# Altium PCB Shiftregisters.PcbDoc
Units mm, origin at the board's own origin, x right, y up, seen from the top; angles counter-clockwise.
Board outline 116.84 x 39.37 mm, 2 copper layers (Top Layer, Bottom Layer); 84 components, 106 nets, 276 pads, 47 vias.
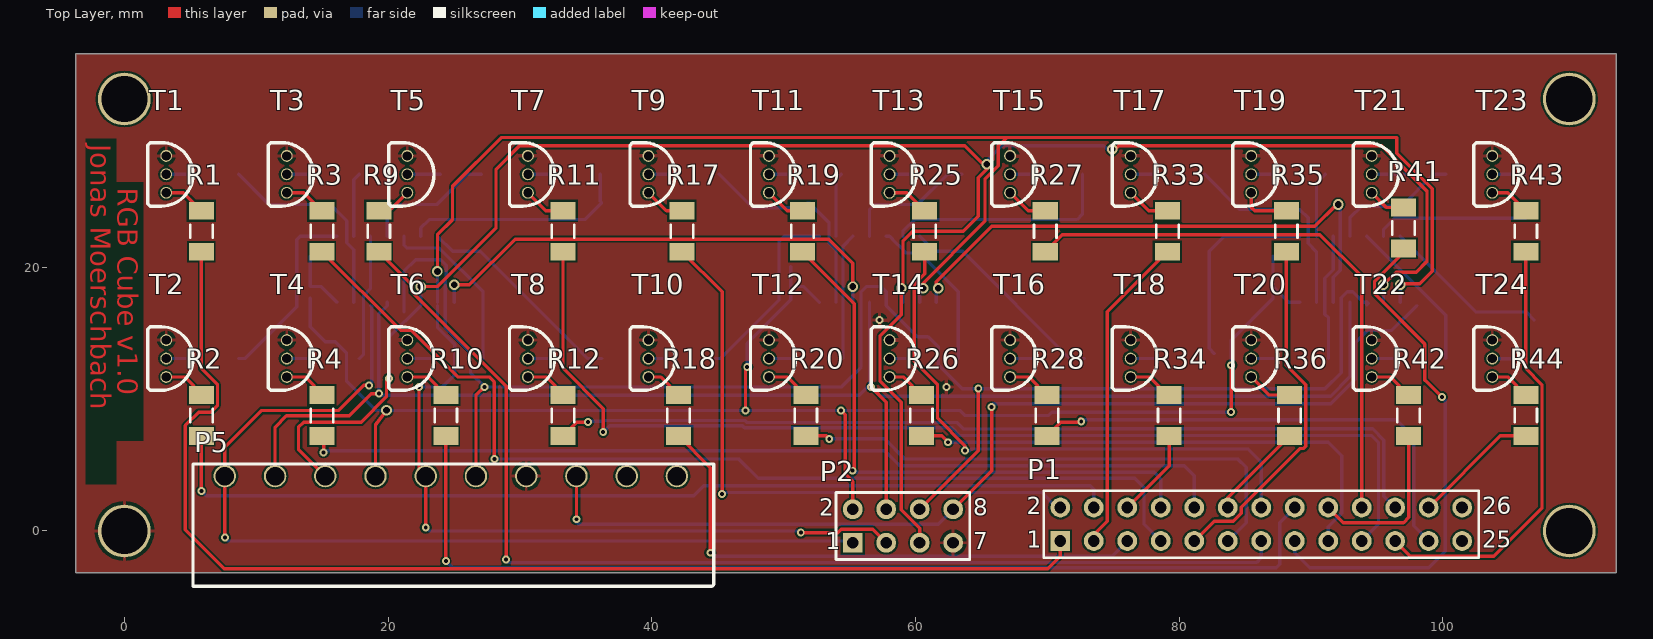
[diagram p0: Top Layer view]
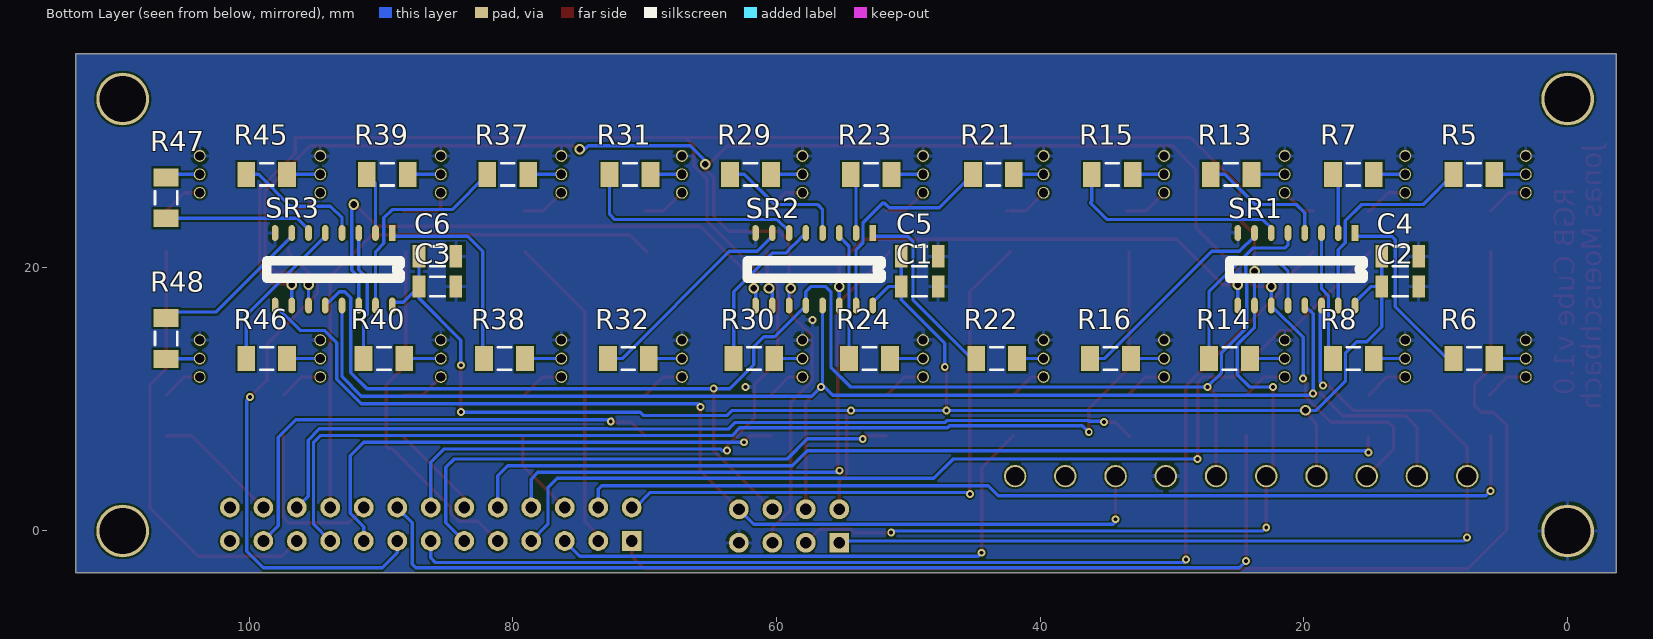
[diagram p1: Bottom Layer view, seen from below]

## Layer stack, top to bottom
Top Solder: solder mask 0.0102, Solder Resist, Dk 3.5
Top Layer: signal copper 0.0356
Dielectric 1: dielectric 0.32, FR-4, Dk 4.8
Bottom Layer: signal copper 0.0356
Bottom Solder: solder mask 0.0102, Solder Resist, Dk 3.5

## Board outline
-3.683,36.195 -3.683,-3.175 113.157,-3.175 113.157,36.195

## Design rules (kind name [scope] priority, off if disabled: settings)
Clearance [All] p1: gap=0.15
DiffPairsRouting [All] p1: maxlimit=0.254 minlimit=0.15 mostfreqgap=0.2 toplayer_minwidth=0.15 toplayer_maxwidth=0.15 toplayer_prefwidth=0.15 bottomlayer_minwidth=0.15 bottomlayer_maxwidth=0.15 bottomlayer_prefwidth=0.15 maxuncoupledlength=12.7
FanoutControl Fanout_SOIC [IsSOIC] p3: bgadir=Out bgaviamode=Centered fanoutstyle=Rows fanoutdirection=InOnly viagrid=0.025 // Fanout_SOIC (Default Rule)
FanoutControl Fanout_Default [All] p5: bgadir=Out bgaviamode=Closest fanoutstyle=Rows fanoutdirection=None viagrid=0.025 // Fanout_Default (Default Rule)
HoleSize [All] p1: absolutevalues=TRUE maxlimit=5.5 minlimit=0.3 maxpercent=80.000 minpercent=20.000
MinimumSolderMaskSliver [All] p1: minsoldermaskwidth=0
PolygonConnect [All] p1: connectstyle=Relief reliefconductorwidth=0.254 reliefentries=4 polygonreliefangle="90 Angle" airgapwidth=0.254
RoutingTopology [OnLayer('Top Layer')] p1: topology=Horizontal
RoutingTopology RoutingTopology_1 [OnLayer('Bottom Layer')] p2: topology=Vertical
RoutingVias [All] p1: holewidth=0.3 width=0.6 viastyle="Through Hole" minholewidth=0.3 minwidth=0.6 maxholewidth=0.3 maxwidth=0.6
SilkToBoardRegionClearance UnpouredPolygon [All] p2:
SilkToSolderMaskClearance [IsPad] p1: minsilkscreentomaskgap=0.01 clearancetoexposedcopper=TRUE
SolderMaskExpansion [All] p1: expansion=0.076
Width [All] p1: maxlimit=2.54 minlimit=0.15 preferedwidth=0.15
22 further rules are at their usual default settings.

## Components (designator, comment, footprint, x,y, rotation, side; value= is the part's Value field where it differs from the comment)
C1 "CAP 100nF 16V 1206(3216)" CAPC1206(3216)190_L 49.149,18.542 r0 bottom
C2 "CAP 100nF 16V 1206(3216)" CAPC1206(3216)190_L 12.7,18.542 r180 bottom
C3 "CAP 100nF 16V 1206(3216)" CAPC1206(3216)190_L 85.725,18.542 r0 bottom
C4 "CAP 1uF 16V 1206(3216)" CAPC1206(3216)150_L 12.7,20.828 r0 bottom
C5 "CAP 1uF 16V 1206(3216)" CAPC1206(3216)150_L 49.149,20.828 r0 bottom
C6 "CAP 1uF 16V 1206(3216)" CAPC1206(3216)150_L 85.725,20.828 r0 bottom
P1 "Header 13X2" HDR2X13 70.993,-0.762 r0 top
P2 "Header 4X2" HDR2X4 55.245,-0.889 r0 top
P5 "Header 10" "10POL PHOENIX" 7.62,0.762 r0 top
R1 "2R 5% 1206(3216)" RESC1206(3216)_M 5.842,22.733 r90 top
R2 "2R 5% 1206(3216)" RESC1206(3216)_M 5.842,8.763 r90 top
R3 "2R 5% 1206(3216)" RESC1206(3216)_M 14.986,22.733 r90 top
R4 "2R 5% 1206(3216)" RESC1206(3216)_M 14.986,8.763 r90 top
R5 "2R 5% 1206(3216)" RESC1206(3216)_M 7.112,27.051 r180 bottom
R6 "2R 5% 1206(3216)" RESC1206(3216)_M 7.112,13.081 r180 bottom
R7 "2R 5% 1206(3216)" RESC1206(3216)_M 16.256,27.051 r180 bottom
R8 "2R 5% 1206(3216)" RESC1206(3216)_M 16.256,13.081 r180 bottom
R9 "2R 5% 1206(3216)" RESC1206(3216)_M 19.304,22.733 r90 top
R10 "2R 5% 1206(3216)" RESC1206(3216)_M 24.384,8.763 r90 top
R11 "2R 5% 1206(3216)" RESC1206(3216)_M 33.274,22.733 r90 top
R12 "2R 5% 1206(3216)" RESC1206(3216)_M 33.274,8.763 r90 top
R13 "2R 5% 1206(3216)" RESC1206(3216)_M 25.527,27.051 r180 bottom
R14 "2R 5% 1206(3216)" RESC1206(3216)_M 25.654,13.081 r180 bottom
R15 "2R 5% 1206(3216)" RESC1206(3216)_M 34.544,27.051 r180 bottom
R16 "2R 5% 1206(3216)" RESC1206(3216)_M 34.671,13.081 r180 bottom
R17 "2R 5% 1206(3216)" RESC1206(3216)_M 42.291,22.733 r90 top
R18 "2R 5% 1206(3216)" RESC1206(3216)_M 42.037,8.763 r90 top
R19 "2R 5% 1206(3216)" RESC1206(3216)_M 51.435,22.733 r90 top
R20 "2R 5% 1206(3216)" RESC1206(3216)_M 51.689,8.763 r90 top
R21 "2R 5% 1206(3216)" RESC1206(3216)_M 43.561,27.051 r180 bottom
R22 "2R 5% 1206(3216)" RESC1206(3216)_M 43.307,13.081 r180 bottom
R23 "2R 5% 1206(3216)" RESC1206(3216)_M 52.832,27.051 r180 bottom
R24 "2R 5% 1206(3216)" RESC1206(3216)_M 52.959,13.081 r180 bottom
R25 "2R 5% 1206(3216)" RESC1206(3216)_M 60.706,22.733 r90 top
R26 "2R 5% 1206(3216)" RESC1206(3216)_M 60.452,8.763 r90 top
R27 "2R 5% 1206(3216)" RESC1206(3216)_M 69.85,22.733 r90 top
R28 "2R 5% 1206(3216)" RESC1206(3216)_M 69.977,8.763 r90 top
R29 "2R 5% 1206(3216)" RESC1206(3216)_M 61.976,27.051 r180 bottom
R30 "2R 5% 1206(3216)" RESC1206(3216)_M 61.722,13.081 r180 bottom
R31 "2R 5% 1206(3216)" RESC1206(3216)_M 71.12,27.051 r180 bottom
R32 "2R 5% 1206(3216)" RESC1206(3216)_M 71.247,13.081 r180 bottom
R33 "2R 5% 1206(3216)" RESC1206(3216)_M 79.121,22.733 r90 top
R34 "2R 5% 1206(3216)" RESC1206(3216)_M 79.248,8.763 r90 top
R35 "2R 5% 1206(3216)" RESC1206(3216)_M 88.138,22.733 r90 top
R36 "2R 5% 1206(3216)" RESC1206(3216)_M 88.392,8.763 r90 top
R37 "2R 5% 1206(3216)" RESC1206(3216)_M 80.391,27.051 r180 bottom
R38 "2R 5% 1206(3216)" RESC1206(3216)_M 80.645,13.081 r180 bottom
R39 "2R 5% 1206(3216)" RESC1206(3216)_M 89.535,27.051 r180 bottom
R40 "2R 5% 1206(3216)" RESC1206(3216)_M 89.789,13.081 r180 bottom
R41 "2R 5% 1206(3216)" RESC1206(3216)_M 97.028,22.987 r90 top
R42 "2R 5% 1206(3216)" RESC1206(3216)_M 97.409,8.763 r90 top
R43 "2R 5% 1206(3216)" RESC1206(3216)_M 106.299,22.733 r90 top
R44 "2R 5% 1206(3216)" RESC1206(3216)_M 106.299,8.763 r90 top
R45 "2R 5% 1206(3216)" RESC1206(3216)_M 98.679,27.051 r180 bottom
R46 "2R 5% 1206(3216)" RESC1206(3216)_M 98.679,13.081 r180 bottom
R47 "2R 5% 1206(3216)" RESC1206(3216)_M 106.299,25.273 r90 bottom
R48 "2R 5% 1206(3216)" RESC1206(3216)_M 106.299,14.605 r270 bottom
SR1 "Blue" SOP16 16.129,22.352 r270 bottom
SR2 "Green" SOP16 52.705,22.352 r270 bottom
SR3 "Red" SOP16 89.154,22.352 r270 bottom
T1 "NPN-Transistor" "2N3904 - DUPLICATE" 3.175,27.051 r90 top
T2 "NPN-Transistor" "2N3904 - DUPLICATE" 3.175,13.081 r90 top
T3 "NPN-Transistor" "2N3904 - DUPLICATE" 12.319,27.051 r90 top
T4 "NPN-Transistor" "2N3904 - DUPLICATE" 12.319,13.081 r90 top
T5 "NPN-Transistor" "2N3904 - DUPLICATE" 21.463,27.051 r90 top
T6 "NPN-Transistor" "2N3904 - DUPLICATE" 21.463,13.081 r90 top
T7 "NPN-Transistor" "2N3904 - DUPLICATE" 30.607,27.051 r90 top
T8 "NPN-Transistor" "2N3904 - DUPLICATE" 30.607,13.081 r90 top
T9 "NPN-Transistor" "2N3904 - DUPLICATE" 39.751,27.051 r90 top
T10 "NPN-Transistor" "2N3904 - DUPLICATE" 39.751,13.081 r90 top
T11 "NPN-Transistor" "2N3904 - DUPLICATE" 48.895,27.051 r90 top
T12 "NPN-Transistor" "2N3904 - DUPLICATE" 48.895,13.081 r90 top
T13 "NPN-Transistor" "2N3904 - DUPLICATE" 58.039,27.051 r90 top
T14 "NPN-Transistor" "2N3904 - DUPLICATE" 58.039,13.081 r90 top
T15 "NPN-Transistor" "2N3904 - DUPLICATE" 67.183,27.051 r90 top
T16 "NPN-Transistor" "2N3904 - DUPLICATE" 67.183,13.081 r90 top
T17 "NPN-Transistor" "2N3904 - DUPLICATE" 76.327,27.051 r90 top
T18 "NPN-Transistor" "2N3904 - DUPLICATE" 76.327,13.081 r90 top
T19 "NPN-Transistor" "2N3904 - DUPLICATE" 85.471,27.051 r90 top
T20 "NPN-Transistor" "2N3904 - DUPLICATE" 85.471,13.081 r90 top
T21 "NPN-Transistor" "2N3904 - DUPLICATE" 94.615,27.051 r90 top
T22 "NPN-Transistor" "2N3904 - DUPLICATE" 94.615,13.081 r90 top
T23 "NPN-Transistor" "2N3904 - DUPLICATE" 103.759,27.051 r90 top
T24 "NPN-Transistor" "2N3904 - DUPLICATE" 103.759,13.081 r90 top

## Footprints (in the part's own frame and the unit in brackets; to place one, negate y for a bottom-side part, rotate by r counter-clockwise, add the part's x,y. Pads: shape width x height; smd on the part's side, far side on the other; paste and mask are expansions set on the pad)
"2N3904 - DUPLICATE" [mm] "Farnell: 1700648"
  round 0.9 hole 0.7: 1(-1.4,0) 2(0,0) 3(1.4,0)
  silkscreen extent -2.41,-2.03 2.41,1.4, body extent -2.77,-2.79 2.77,1.28, height 7.7
"10POL PHOENIX" [mm]
  round 1.7 hole 1.4: 1(0,3.4) 2(3.81,3.4) 3(7.62,3.4) 4(11.43,3.4) 5(15.24,3.4) 6(19.05,3.4) 7(22.86,3.4) 8(26.67,3.4) 9(30.48,3.4) 10(34.29,3.4)
  silkscreen extent -2.41,-4.95 37.08,4.32, body extent -2.47,-4.83 37.02,4.47, height 3.9
CAPC1206(3216)150_L [mm] "Chip Capacitor, Body 3.2x1.6mm, Height 1.5mm, IPC High Density"
  rect 0.95x1.7 smd: 1(-1.4,0) 2(1.4,0)
  silkscreen extent -0.55,-0.75 0.55,0.75, body extent -1.7,-0.9 1.7,0.9, height 1.5
CAPC1206(3216)190_L [mm] "Chip Capacitor, Body 3.2x1.6mm, Height 1.9mm, IPC High Density"
  rect 0.95x1.7 smd: 1(-1.4,0) 2(1.4,0)
  silkscreen extent -0.55,-0.75 0.55,0.75, body extent -1.7,-0.9 1.7,0.9, height 1.9
HDR2X4 [mm] "Connector; Header; 4x2 Position"
  rect 1.5x1.5 hole 0.9: 1(0,0)
  round 1.5 hole 0.9: 2(0,2.54) 3(2.54,0) 4(2.54,2.54) 5(5.08,0) 6(5.08,2.54) 7(7.62,0) 8(7.62,2.54)
  silkscreen extent -1.27,-1.27 8.89,3.81
HDR2X13 [mm] "Connector; Header; 13x2 Position"
  rect 1.5x1.5 hole 0.9: 1(0,0)
  round 1.5 hole 0.9: 2(0,2.54) 3(2.54,0) 4(2.54,2.54) 5(5.08,0) 6(5.08,2.54) 7(7.62,0) 8(7.62,2.54) 9(10.16,0) 10(10.16,2.54) 11(12.7,0) 12(12.7,2.54) 13(15.24,0) 14(15.24,2.54) 15(17.78,0) 16(17.78,2.54) 17(20.32,0) 18(20.32,2.54) 19(22.86,0) 20(22.86,2.54) 21(25.4,0) 22(25.4,2.54) 23(27.94,0) 24(27.94,2.54) 25(30.48,0) 26(30.48,2.54)
  silkscreen extent -1.27,-1.27 31.75,3.81
RESC1206(3216)_M [mm] "Chip Resistor, Body 3.2x1.6mm, IPC Low Density"
  rect 1.35x1.9 smd: 1(-1.55,0) 2(1.55,0)
  silkscreen extent -0.5,-0.85 0.5,0.85, body extent -1.67,-0.87 1.67,0.87, height 0.75
SOP16 [mm]
  rect 1.2x0.5 smd: 1(-0.25,0)
  oval 1.2x0.5 smd: 2(-0.25,-1.27) 3(-0.25,-2.54) 4(-0.25,-3.81) 5(-0.25,-5.08) 6(-0.25,-6.35) 7(-0.25,-7.62) 8(-0.25,-8.89) 9(5.25,-8.89) 10(5.25,-7.62) 11(5.25,-6.35) 12(5.25,-5.08) 13(5.25,-3.81) 14(5.25,-2.54) 15(5.25,-1.27) 16(5.25,0)
  silkscreen extent 1.86,-9.53 3.17,0.63

## Part data
C1 C2 C3: library part CMP-1037-04176-1, "CAP 100nF 16V ±1% 1206 (3216 Metric) Thickness 1.9mm SMD"
C4 C5 C6: library part CMP-1037-04681-1, "CAP 1uF 16V ±5% 1206 (3216 Metric) Thickness 1.45mm SMD"
P1: "Header, 13-Pin, Dual row"
P2: "Header, 4-Pin, Dual row"
P5: "Header, 10-Pin"
R1 R2 R3 R4 R5 R6 R7 R8 R9 R10 R11 R12 R13 R14 R15 R16 R17 R18 R19 R20 R21 R22 R23 R24 R25 R26 R27 R28 R29 R30 R31 R32 R33 R34 R35 R36 R37 R38 R39 R40 R41 R42 R43 R44 R45 R46 R47 R48: library part CMP-1014-00009-1, "2R 0.25W 5% 1206 (3216 Metric)  SMD"
SR1 SR2 SR3: library part 74HC595, "74HC595 Farnell:  2098004"

## Free pads (board coordinates)
  round 4 hole 3.5: 0(0,0) 1(0,32.766) 2(109.601,32.766) 3(109.601,0)

## Via types
v1: diameter 0.6, hole 0.3, Top Layer to Bottom Layer, 34 vias
v2: diameter 0.8, hole 0.5, Top Layer to Bottom Layer, 13 vias

## Nets (pads, with @x,y where several pads share a name; then routed paths per layer and width w, separated by ;. In a path a pad name is that pad's centre, name@x,y a point inside that pad or via, vN(x,y) a via of type N, cw(c..) or ccw(c..) an arc to the next point about the centre after c; other vN are vias at no path point)
5V: C1.2 C2.1 C3.2 C4.2 C5.2 C6.2 P2.2 P5.4 SR1.16 SR2.16 SR3.16 | length 124.7
  Top Layer w0.254: P5.4 19.05,8.055 v2(19.885,9.144) ; v1(47.117,9.144) 47.117,12.319 v1(47.244,12.446) ; v1(54.356,9.144) 54.668,8.832 54.668,4.333 55.245,3.756 P2.2 ; v1(83.947,9.017) v1(83.947,12.573)
  Bottom Layer w0.254: 14.1,17.653 14.1,15.494 15.243,14.351 16.002,14.351 16.854,13.499 16.854,11.34 19.05,9.144 v2(19.885,9.144) v1(47.117,9.144) v1(54.356,9.144) 63.373,9.144 63.754,8.763 70.104,8.763 70.358,9.017 v1(83.947,9.017) ; C4.2 C2.1 14.939,18.542 SR1.16@16.129,17.352 ; v1(47.244,12.446) 47.244,14.224 50.549,17.529 C1.2 ; C5.2@50.549,20.066 C1.2 ; SR2.16@52.705,17.352 51.515,18.542 C1.2 ; v1(83.947,12.573) 83.947,14.478 87.125,17.656 C3.2 ; C6.2 C3.2 ; SR3.16@89.154,17.352 88.315,17.352 C3.2
B_0: P1.1 R1.1 | length 92.3
  Top Layer w0.254: R1.1 5.842,12.33 7.069,11.103 7.069,9.523 6.563,9.017 5.629,9.017 4.615,8.003 4.615,0.084 7.562,-2.863 70.035,-2.863 70.993,-1.905 P1.1
B_1: P1.4 R2.1 | length 73.8
  Top Layer w0.254: v1(5.842,3.048) R2.1
  Bottom Layer w0.254: v1(5.842,3.048) 6.223,2.667 43.18,2.667 43.942,3.429 73.279,3.429 73.533,3.175 P1.4
B_2: P1.7 R3.1 | length 77.8
  Top Layer w0.254: R3.1 20.961,15.208 21.764,15.208 25.288,11.684 27.686,11.684 28.067,11.303 v1(28.067,5.461)
  Bottom Layer w0.254: v1(28.067,5.461) 46.609,5.461 48.075,3.995 76.627,3.995 77.343,3.279 77.343,0.508 P1.7
B_3: P1.10 R4.1 | length 70.4
  Top Layer w0.254: v1(15.113,5.969) R4.1@15.113,7.086
  Bottom Layer w0.254: v1@15.113,6.096 57.658,6.096 58.801,4.953 80.391,4.953 81.153,4.191 P1.10
B_4: P1.13 R9.1 | length 86.2
  Top Layer w0.254: R9.1 21.802,18.685 21.802,18.139 28.956,10.985 v1(28.956,-2.159)
  Bottom Layer w0.254: v1(28.956,-2.159) 28.956,-2.286 29.06,-2.39 85.875,-2.39 86.233,-2.032 P1.13
B_5: P1.16 R10.1 | length 77.9
  Top Layer w0.254: v1(24.384,-2.286) R10.1
  Bottom Layer w0.254: v1(24.384,-2.286) 24.892,-2.794 87.376,-2.794 87.63,-2.54 87.63,0.635 P1.16
B_6: P1.19 R11.1 | length 82.5
  Top Layer w0.254: R11.1 33.274,12.33 36.322,9.282 v1(36.322,7.493)
  Bottom Layer w0.254: v1(36.322,7.493) 36.807,7.978 46.886,7.978 47.036,7.828 62.784,7.828 63.373,7.239 94.615,7.239 95.123,6.731 95.123,0.508 P1.19
B_7: P1.22 R12.1 | length 68.9
  Top Layer w0.254: R12.1@33.213,7.152 R12.1 34.316,8.255 v1(35.179,8.255)
  Bottom Layer w0.254: v1(35.179,8.255) 35.237,8.313 36.317,8.313 36.386,8.382 47.054,8.382 47.204,8.232 63.142,8.232 63.632,7.742 72.819,7.742 72.825,7.747 94.678,7.747 95.527,6.898 95.527,2.644 P1.22
B_Q0: R5.1 SR1.15 | length 16.1
  Bottom Layer w0.254: R5.1 10.948,24.765 15.621,24.765 16.872,23.514 16.872,21.859 17.399,21.332 SR1.15@17.399,17.352
B_Q1: R6.1 SR1.1 | length 14.3
  Bottom Layer w0.254: R6.1 9.144,13.081 13.081,17.018 13.081,22.098 13.335,22.352 SR1.1@16.129,22.352
B_Q2: R7.1 SR1.2 | length 4.9
  Bottom Layer w0.254: SR1.2@17.399,22.352 17.399,26.644 R7.1
B_Q3: R8.1 SR1.3 | length 9.6
  Bottom Layer w0.254: R8.1 18.142,13.417 18.142,17.845 18.669,18.372 SR1.3@18.669,22.352
B_Q4: R13.1 SR1.4 | length 10.1
  Bottom Layer w0.254: SR1.4@19.939,22.352 19.939,24.13 20.574,24.765 23.708,24.765 25.994,27.051 R13.1
B_Q5: R14.1 SR1.5 | length 13.2
  Bottom Layer w0.254: SR1.5@21.209,22.352 21.209,21.717 21.463,21.463 23.876,21.463 27.204,18.135 R14.1
B_Q6: R15.1 SR1.6 | length 17.3
  Bottom Layer w0.254: SR1.6@22.479,22.352 22.479,22.987 23.114,23.622 34.925,23.622 36.195,24.892 36.094,24.993 R15.1
B_Q7: R16.1 SR1.7 | length 16.3
  Bottom Layer w0.254: SR1.7@23.749,22.352 24.892,21.209 27.01,21.209 35.138,13.081 R16.1
DS: P2.1 P5.1 SR1.14 | length 73.5
  Top Layer w0.254: v1(7.62,-0.508) P5.1 7.62,6.35 10.414,9.144 16.256,9.144 18.161,11.049 v1(18.542,11.049)
  Bottom Layer w0.254: v1(7.62,-0.508) 7.874,-0.762 P2.1@55.118,-0.762 ; v1(18.542,11.049) 18.758,11.265 18.758,17.013 SR1.14
G_0: P1.2 R17.1 | length 46.1
  Top Layer w0.254: R17.1 45.339,18.135 v1(45.339,2.794)
  Bottom Layer w0.254: v1@45.212,2.921 v1(45.339,2.794) 45.339,2.921 69.573,2.921 70.716,1.778 P1.2
G_1: P1.5 R18.1 | length 42.1
  Top Layer w0.254: R18.1 44.45,4.8 v1(44.45,-1.651)
  Bottom Layer w0.254: v1(44.45,-1.651) 44.704,-1.905 54.369,-1.905 54.38,-1.916 74.919,-1.916 P1.5
G_2: P1.8 R19.1 | length 43.9
  Top Layer w0.254: R19.1 55.372,17.246 55.372,4.699 v1(55.245,4.572)
  Bottom Layer w0.254: v1@55.372,4.445 78.105,4.445 78.613,3.937 P1.8
G_3: P1.11 R20.1 | length 40.2
  Top Layer w0.254: R20.1 53.239,7.213
  Bottom Layer w0.254: v1(53.467,6.985) 57.658,6.985 59.182,5.461 84.455,5.461 85.09,4.826 85.09,0.635 P1.11
G_4: P1.14 R25.1 | length 43.7
  Top Layer w0.254: R25.1 60.706,19.499 59.902,18.695 59.902,12.88 61.679,11.103 61.679,8.552 63.754,6.477 63.754,5.969 v1(63.754,6.096)
  Bottom Layer w0.254: v1(63.754,6.096) 64.135,6.096 64.262,6.223 85.217,6.223 86.233,5.207 P1.14
G_5: P1.17 R26.1 | length 39.4
  Top Layer w0.254: R26.1 62.002,7.213 v1(62.484,6.731)
  Bottom Layer w0.254: v1(62.484,6.731) 91.313,6.731 92.34,5.704 92.34,1.353 91.313,0.326 P1.17
G_6: P1.20 R27.1 | length 43.4
  Top Layer w0.254: R27.1 71.146,22.479 90.678,22.479 93.853,19.304 P1.20
G_7: P1.23 R28.1 | length 38.3
  Top Layer w0.254: R28.1 71.019,8.255 72.644,8.255 72.517,8.382 72.517,8.509 72.581,8.445 v1(72.581,8.319)
  Bottom Layer w0.254: v1(72.581,8.319) 72.581,8.445 72.517,8.509 72.517,8.382 72.644,8.255 72.829,8.44 96.462,8.44 97.79,7.112 97.79,0.381 P1.23
G_Q0: R21.1 SR2.15 | length 16.4
  Bottom Layer w0.254: R21.1 47.651,24.511 51.463,24.511 51.83,24.878 51.955,24.878 53.448,23.385 53.448,21.859 53.975,21.332 SR2.15@53.975,17.352
G_Q1: R22.1 SR2.1 | length 14.3
  Bottom Layer w0.254: R22.1 45.212,13.081 49.657,17.526 49.657,21.971 50.038,22.352 SR2.1@52.705,22.352
G_Q2: R23.1 SR2.2 | length 4.9
  Bottom Layer w0.254: SR2.2@53.975,22.352 53.975,26.644 R23.1
G_Q3: R24.1 SR2.3 | length 9.6
  Bottom Layer w0.254: R24.1 54.509,21.616 SR2.3@55.245,22.352
G_Q4: R29.1 SR2.4 | length 10.1
  Bottom Layer w0.254: SR2.4@56.515,22.352 56.515,24.384 56.896,24.765 60.157,24.765 62.443,27.051 R29.1
G_Q5: R30.1 SR2.5 | length 12.3
  Bottom Layer w0.254: SR2.5@57.785,22.352 58.039,22.352 58.528,21.863 58.528,21.859 58.837,21.55 58.841,21.55 59.309,21.082 60.325,21.082 63.246,18.161 63.246,13.107 R30.1
G_Q6: R31.1 SR2.6 | length 17.6
  Bottom Layer w0.254: SR2.6@59.055,22.352 59.055,22.733 59.944,23.622 72.263,23.622 72.67,24.029 R31.1
G_Q7: R32.1 SR2.7 | length 16.3
  Bottom Layer w0.254: SR2.7@60.325,22.352 61.468,21.209 63.586,21.209 71.714,13.081 R32.1
GND: C1.1 C2.2 C3.1 C4.1 C5.1 C6.1 P2.7 P5.7 pad.0 SR1.8 SR2.8 SR3.8 T1.3 T2.3 T3.3 T4.3 T5.3 T6.3 T7.3 T8.3 T9.3 T10.3 T11.3 T12.3 T13.3 T14.3 T15.3 T16.3 T17.3 T18.3 T19.3 T20.3 T21.3 T22.3 T23.3 T24.3
  other v1: 62.357,10.922 57.289,15.991
MR: P2.3 P5.5 SR1.10 SR2.10 SR3.10 | length 169.3
  Top Layer w0.254: v1(22.352,10.922) 22.352,4.67 P5.5 v1(22.86,0.254) ; v2(23.749,19.685) 23.749,22.483 24.89,23.624 24.89,26.16 28.575,29.845 66.929,29.845 ; v1(51.308,-0.127) 54.115,-0.127 54.38,0.138 56.758,0.138 P2.3 ; v2(60.579,18.415) 60.452,18.415 60.325,18.542 65.278,23.495 65.278,26.67 66.294,27.686 66.294,29.21 66.929,29.845 ; v2(96.774,18.669) 96.869,18.764 98.266,18.764 99.21,19.708 99.21,25.948 96.52,28.638 96.52,29.845 66.929,29.845
  Bottom Layer w0.254: v1(22.352,10.922) 24.13,10.922 25.019,11.811 25.019,11.858 25.056,11.895 25.056,14.146 23.749,15.453 SR1.10 ; v1(22.86,0.254) 23.114,0 51.181,0 v1(51.308,-0.127) ; SR1.10@23.749,17.352 v2(23.749,19.685) v2@23.749,19.939 ; SR2.10@60.325,17.352 60.325,18.542 60.452,18.415 v2(60.579,18.415) ; SR3.10@96.774,17.352 v2(96.774,18.669)
NetR1_2: R1.2 T1.1 | length 3.2
  Top Layer w0.254: T1.1 4.474,25.651 R1.2
NetR2_2: R2.2 T2.1 | length 3.3
  Top Layer w0.254: T2.1 4.575,11.681 R2.2@5.943,10.313
NetR3_2: R3.2 T3.1 | length 3.3
  Top Layer w0.254: T3.1 13.618,25.651 R3.2 ; R3.2@15.087,24.283 R3.2@15.119,24.251
NetR4_2: R4.2 T4.1 | length 3.3
  Top Layer w0.254: T4.1 13.719,11.681 R4.2@15.087,10.313
NetR5_2: R5.2 T1.2 | length 2.4
  Bottom Layer w0.254: T1.2 R5.2
NetR6_2: R6.2 T2.2 | length 2.4
  Bottom Layer w0.254: T2.2 R6.2
NetR7_2: R7.2 T3.2 | length 2.4
  Bottom Layer w0.254: T3.2 R7.2
NetR8_2: R8.2 T4.2 | length 2.4
  Bottom Layer w0.254: T4.2 R8.2
NetR9_2: R9.2 T5.1 | length 2.8
  Top Layer w0.254: R9.2@19.336,24.251 R9.2 20.095,24.283 T5.1
NetR10_2: R10.2 T6.1 | length 3.6
  Top Layer w0.254: T6.1 23.016,11.681 R10.2 R10.2@24.231,10.313
NetR11_2: R11.2 T7.1 | length 3.3
  Top Layer w0.254: T7.1 31.975,24.283 R11.2 ; R11.2@33.375,24.283 R11.2@33.407,24.251
NetR12_2: R12.2 T8.1 | length 3.3
  Top Layer w0.254: T8.1 32.007,11.681 R12.2@33.375,10.313
NetR13_2: R13.2 T5.2 | length 2.5
  Bottom Layer w0.254: T5.2 R13.2
NetR14_2: R14.2 T6.2 | length 2.6
  Bottom Layer w0.254: T6.2 R14.2
NetR15_2: R15.2 T7.2 | length 2.4
  Bottom Layer w0.254: T7.2 R15.2
NetR16_2: R16.2 T8.2 | length 2.5
  Bottom Layer w0.254: T8.2 R16.2
NetR17_2: R17.2 T9.1 | length 3.2
  Top Layer w0.254: T9.1 41.119,24.283 R17.2 ; R17.2@42.519,24.283 R17.2@42.551,24.251
NetR18_2: R18.2 T10.1 | length 2.9
  Top Layer w0.254: T10.1 40.669,11.681 R18.2
NetR19_2: R19.2 T11.1 | length 3.2
  Top Layer w0.254: T11.1 50.263,24.283 R19.2 ; R19.2@51.663,24.283 R19.2@51.695,24.251
NetR20_2: R20.2 T12.1 | length 3.3
  Top Layer w0.254: T12.1 50.295,11.681 R20.2@51.663,10.313
NetR21_2: R21.2 T9.2 | length 2.3
  Bottom Layer w0.254: T9.2 R21.2
NetR22_2: R22.2 T10.2 | length 2
  Bottom Layer w0.254: T10.2 R22.2
NetR23_2: R23.2 T11.2 | length 2.4
  Bottom Layer w0.254: T11.2 R23.2
NetR24_2: R24.2 T12.2 | length 2.5
  Bottom Layer w0.254: T12.2 R24.2
NetR25_2: R25.2 T13.1 | length 3.3
  Top Layer w0.254: T13.1 59.338,25.651 R25.2 ; R25.2@60.807,24.283 R25.2@60.839,24.251
NetR26_2: R26.2 T14.1 | length 3
  Top Layer w0.254: T14.1 59.084,11.681 R26.2
NetR27_2: R27.2 T15.1 | length 3.3
  Top Layer w0.254: T15.1 68.551,24.283 R27.2 ; R27.2@69.951,24.283 R27.2@69.983,24.251
NetR28_2: R28.2 T16.1 | length 3.4
  Top Layer w0.254: T16.1 68.609,11.681 R28.2 R28.2@69.951,10.313
NetR29_2: R29.2 T13.2 | length 2.4
  Bottom Layer w0.254: T13.2 R29.2
NetR30_2: R30.2 T14.2 | length 2.1
  Bottom Layer w0.254: T14.2 R30.2
NetR31_2: R31.2 T15.2 | length 2.4
  Bottom Layer w0.254: T15.2 R31.2
NetR32_2: R32.2 T16.2 | length 2.5
  Bottom Layer w0.254: T16.2 R32.2
NetR33_2: R33.2 T17.1 | length 3.4
  Top Layer w0.254: T17.1 77.695,24.283 R33.2@79.095,24.283 ; R33.2 R33.2@79.095,24.283 ; R33.2@79.127,24.251 R33.2@79.095,24.283
NetR34_2: R34.2 T18.1 | length 3.4
  Top Layer w0.254: T18.1 77.727,11.681 R34.2@79.127,10.281
NetR35_2: R35.2 T19.1 | length 4
  Top Layer w0.254: T19.1 85.471,24.537 85.725,24.283 R35.2 88.239,24.283 R35.2@88.271,24.251
NetR36_2: R36.2 T20.1 | length 3.4
  Top Layer w0.254: T20.1 86.839,10.313 88.239,10.313 R36.2@88.271,10.281
NetR37_2: R37.2 T17.2 | length 2.5
  Bottom Layer w0.254: T17.2 R37.2
NetR38_2: R38.2 T18.2 | length 3
  Bottom Layer w0.254: T18.2 R38.2 79.095,12.853 R38.2@79.121,12.827
NetR39_2: R39.2 T19.2 | length 2.5
  Bottom Layer w0.254: T19.2 R39.2
NetR40_2: R40.2 T20.2 | length 2.8
  Bottom Layer w0.254: T20.2 R40.2
NetR41_2: R41.2 T21.1 | length 2.9
  Top Layer w0.254: T21.1 95.729,24.537 R41.2 ; R41.2@97.383,24.283 R41.2@97.415,24.251
NetR42_2: R42.2 T22.1 | length 3.3
  Top Layer w0.254: T22.1 96.015,11.681 R42.2@97.383,10.313
NetR43_2: R43.2 T23.1 | length 3.1
  Top Layer w0.254: T23.1 104.931,25.651 R43.2
NetR44_2: R44.2 T24.1 | length 3.1
  Top Layer w0.254: T24.1 104.931,11.681 R44.2
NetR45_2: R45.2 T21.2 | length 2.5
  Bottom Layer w0.254: T21.2 R45.2
NetR46_2: R46.2 T22.2 | length 2.5
  Bottom Layer w0.254: T22.2 R46.2
NetR47_2: R47.2 T23.2 | length 2.5
  Bottom Layer w0.254: T23.2 R47.2@106.273,27.051
NetR48_2: R48.2 T24.2 | length 2.6
  Bottom Layer w0.254: T24.2 103.785,13.055 R48.2
NetSR1_9: SR1.9 SR2.14 | length 36.4
  Top Layer w0.254: v2(25.019,18.669) 26.168,18.669 29.634,22.135 53.43,22.135 55.245,20.32 v2(55.245,18.542)
  Bottom Layer w0.254: SR1.9@25.019,17.352 v2@25.019,18.415 ; SR2.14@55.245,17.352 v2(55.245,18.542)
NetSR2_9: SR2.9 SR3.14 | length 42.4
  Top Layer w0.254: v2(61.722,18.415) 61.595,18.542 61.595,18.923 65.786,23.114 90.297,23.114 v2@91.948,24.765
  Bottom Layer w0.254: SR2.9@61.595,17.352 61.595,18.542 v2(61.722,18.415) ; SR3.14@91.694,17.352 91.694,19.241 92.221,19.768 92.221,24.619 v2(92.075,24.765)
OE: P2.4 P5.2 SR1.13 SR2.13 SR3.13 | length 116.5
  Top Layer w0.254: P5.2 11.43,7.874 12.296,8.74 17.049,8.74 18.723,10.414 v1(19.304,10.414) ; v1(56.642,10.922) 57.785,9.779 P2.4
  Bottom Layer w0.254: v1@19.304,10.287 55.753,10.287 v1@56.515,11.049 ; v1(19.304,10.414) 19.304,16.467 SR1.13 SR1.13@19.939,17.352 ; SR2.13@56.515,17.352 SR2.13 v1@56.515,11.049 ; SR3.13@92.964,17.352 92.964,11.684 91.498,10.218 57.346,10.218 v1@56.515,11.049
Q7S: P2.8 P5.8 SR3.9 | length 78.5
  Top Layer w0.254: v1(34.29,0.889) P5.8 ; P2.8 65.786,4.572 v1(65.786,9.398)
  Bottom Layer w0.254: v1@34.29,0.669 34.451,0.508 61.722,0.508 P2.8 ; v1(65.786,9.398) 65.913,9.525 65.913,9.652 91.503,9.652 93.368,11.517 93.368,14.262 94.314,15.208 96.15,15.208 SR3.9
R_0: P1.3 R33.1 | length 24.3
  Top Layer w0.254: P1.3 73.533,-0.276 74.56,0.751 74.56,16.622 R33.1
R_1: P1.6 R34.1 | length 6.8
  Top Layer w0.254: P1.6 79.248,4.953 R34.1
R_2: P1.9 R35.1 | length 27.1
  Top Layer w0.254: P1.9 82.666,0.751 84.118,0.751 84.72,1.353 84.72,1.789 89.192,6.261 89.457,6.261 89.619,6.423 89.619,11.103 88.138,12.584 R35.1
R_3: P1.12 R36.1 | length 7.4
  Top Layer w0.254: P1.12 83.693,2.514 R36.1
R_4: P1.15 R41.1 | length 39.4
  Top Layer w0.254: R41.1 97.028,21.15 94.827,18.949 94.827,17.992 98.636,14.183 98.636,11.43 98.679,11.43 v1(99.949,10.16)
  Bottom Layer w0.254: P1.15 88.773,-1.651 89.916,-2.794 98.933,-2.794 100.203,-1.524 100.203,9.906 v1(99.949,10.16)
R_5: P1.18 R42.1 | length 12.9
  Top Layer w0.254: P1.18 92.456,0.635 97.028,0.635 97.42,1.027 97.42,7.202 R42.1
R_6: P1.21 R43.1 | length 33.1
  Top Layer w0.254: P1.21 97.536,-1.905 103.886,-1.905 107.526,1.735 107.526,11.103 106.299,12.33 R43.1
R_7: P1.24 R44.1 | length 9.6
  Top Layer w0.254: P1.24 104.368,7.213 R44.1
R_Q0: R37.1 SR3.15 | length 15.9
  Bottom Layer w0.254: R37.1 84.608,24.384 89.172,24.384 89.793,23.763 89.793,21.816 90.424,21.185 SR3.15@90.424,17.352
R_Q1: R38.1 SR3.1 | length 15.2
  Bottom Layer w0.254: R38.1@82.677,13.462 82.296,13.843 82.296,21.209 83.439,22.352 SR3.1@89.154,22.352
R_Q2: R39.1 SR3.2 | length 5
  Bottom Layer w0.254: SR3.2@90.424,22.352 90.424,26.39 R39.1
R_Q3: R40.1 SR3.3 | length 9.6
  Bottom Layer w0.254: R40.1 91.339,16.17 91.063,16.446 91.063,19.181 91.694,19.812 SR3.3@91.694,22.352
R_Q4: R45.1 SR3.4 | length 10
  Bottom Layer w0.254: SR3.4@92.964,22.352 92.964,23.749 93.853,24.638 96.88,24.638 99.293,27.051 R45.1
R_Q5: R46.1 SR3.5 | length 11.8
  Bottom Layer w0.254: SR3.5@94.234,22.352 100.229,16.357 R46.1
R_Q6: R47.1 SR3.6 | length 11.7
  Bottom Layer w0.254: SR3.6@95.504,22.352 95.504,22.86 96.367,23.723 R47.1
R_Q7: R48.1 SR3.7 | length 12.8
  Bottom Layer w0.254: SR3.7@96.774,22.352 102.514,16.612 106.324,16.612 R48.1@106.934,16.002
SHCP: P2.5 P5.3 SR1.11 SR2.11 SR3.11 | length 155.2
  Top Layer w0.254: P5.3 13.208,6.194 13.208,7.874 13.589,8.255 17.961,8.255 19.881,10.175 19.881,11.372 v1(20.066,11.557) ; v2(22.479,18.542) 23.749,18.542 28.194,22.987 28.194,27.432 29.972,29.21 63.754,29.21 v2@65.278,27.686 ; P2.5 60.325,0.199 58.928,1.596 58.928,9.764 57.312,11.38 57.312,14.782 58.928,16.398 v2(58.928,18.415) 59.055,18.542 59.055,21.971 59.817,22.733 63.627,22.733 64.77,23.876 64.77,26.797 v2@65.405,27.432 ; v2(65.405,27.813) v2@65.405,28.067 ; v2@74.93,28.702 75.438,29.21 95.377,29.21 98.806,25.781 98.806,20.447 97.98,19.621 96.456,19.621 v2(95.504,18.669)
  Bottom Layer w0.254: v1(20.066,11.557) 20.066,14.689 SR1.11 ; SR1.11@22.479,17.352 v2(22.479,18.542) ; v2(58.928,18.415) 59.055,18.542 SR2.11@59.055,17.352 ; v2(65.405,27.813) 65.405,28.067 66.548,29.21 74.295,29.21 74.549,28.956 v2(74.93,28.956) ; SR3.11@95.504,17.352 v2(95.504,18.669)
STP: P2.6 P5.6 SR1.12 SR2.12 SR3.12 | length 120.6
  Top Layer w0.254: P5.6 26.67,10.287 v1(27.305,10.922) ; P2.6 64.77,6.096 v1(64.77,10.795)
  Bottom Layer w0.254: SR1.12@21.209,16.637 SR1.12 21.209,19.685 22.098,20.574 24.003,20.574 24.426,20.151 24.426,19.211 24.342,19.127 24.342,15.431 26.252,13.521 26.252,12.016 v1@27.326,10.943 ; v1@27.346,10.922 54.367,10.922 55.88,12.435 55.88,18.161 56.261,18.542 57.404,18.542 57.785,18.161 SR2.12 60.155,14.732 60.96,14.732 61.722,13.97 61.722,12.614 63.541,10.795 v1(64.77,10.795) 91.07,10.795 92.291,12.016 92.291,17.699 92.746,18.154 93.182,18.154 93.984,17.352 94.234,17.352 94.234,17.145 94.361,17.272 SR3.12@94.234,17.399
pads on no net: P1.25 P1.26 P5.9 P5.10

## Polygon pours and split planes (outlines as drawn)
GND on Top Layer "GND TL" (solid, pour order 4): -3.683,36.195 -3.683,-3.175 113.157,-3.175 113.157,36.195
GND on Bottom Layer "GND BT" (solid, pour order 2): -3.683,36.195 -3.683,-3.175 113.157,-3.175 113.157,36.195

## Other copper
Top Layer:
  text "Jonas Moerschbach" at -2.54,29.337 h1.52 r270
  text "RGB Cube v1.0" at -0.508,26.036 h1.52 r270

## Silkscreen, mask and mechanical layers (free items; w line width, h text height)
Mechanical 1:
  the board outline again, w0.254

## Text inside footprints (layer, text, board x,y; h text height)
P1: Top Overlay "2" at 68.453,1.27 h1.27; Top Overlay "1" at 68.453,-1.27 h1.27; Top Overlay "25" at 102.997,-1.27 h1.27; Top Overlay "26" at 102.997,1.27 h1.27
P2: Top Overlay "2" at 52.705,1.143 h1.27; Top Overlay "1" at 53.213,-1.397 h1.27; Top Overlay "7" at 64.389,-1.397 h1.27; Top Overlay "8" at 64.389,1.143 h1.27